# Altium PCB WIRELM-SMD_E73-2G4M08S1C.pcbdoc
Units mm, origin at the board's own origin, x right, y up, seen from the top; angles counter-clockwise.
Board outline 27.71 x 31.76 mm, 2 copper layers (Top Layer, Bottom Layer); 1 components, 0 nets, 43 pads, 0 vias.
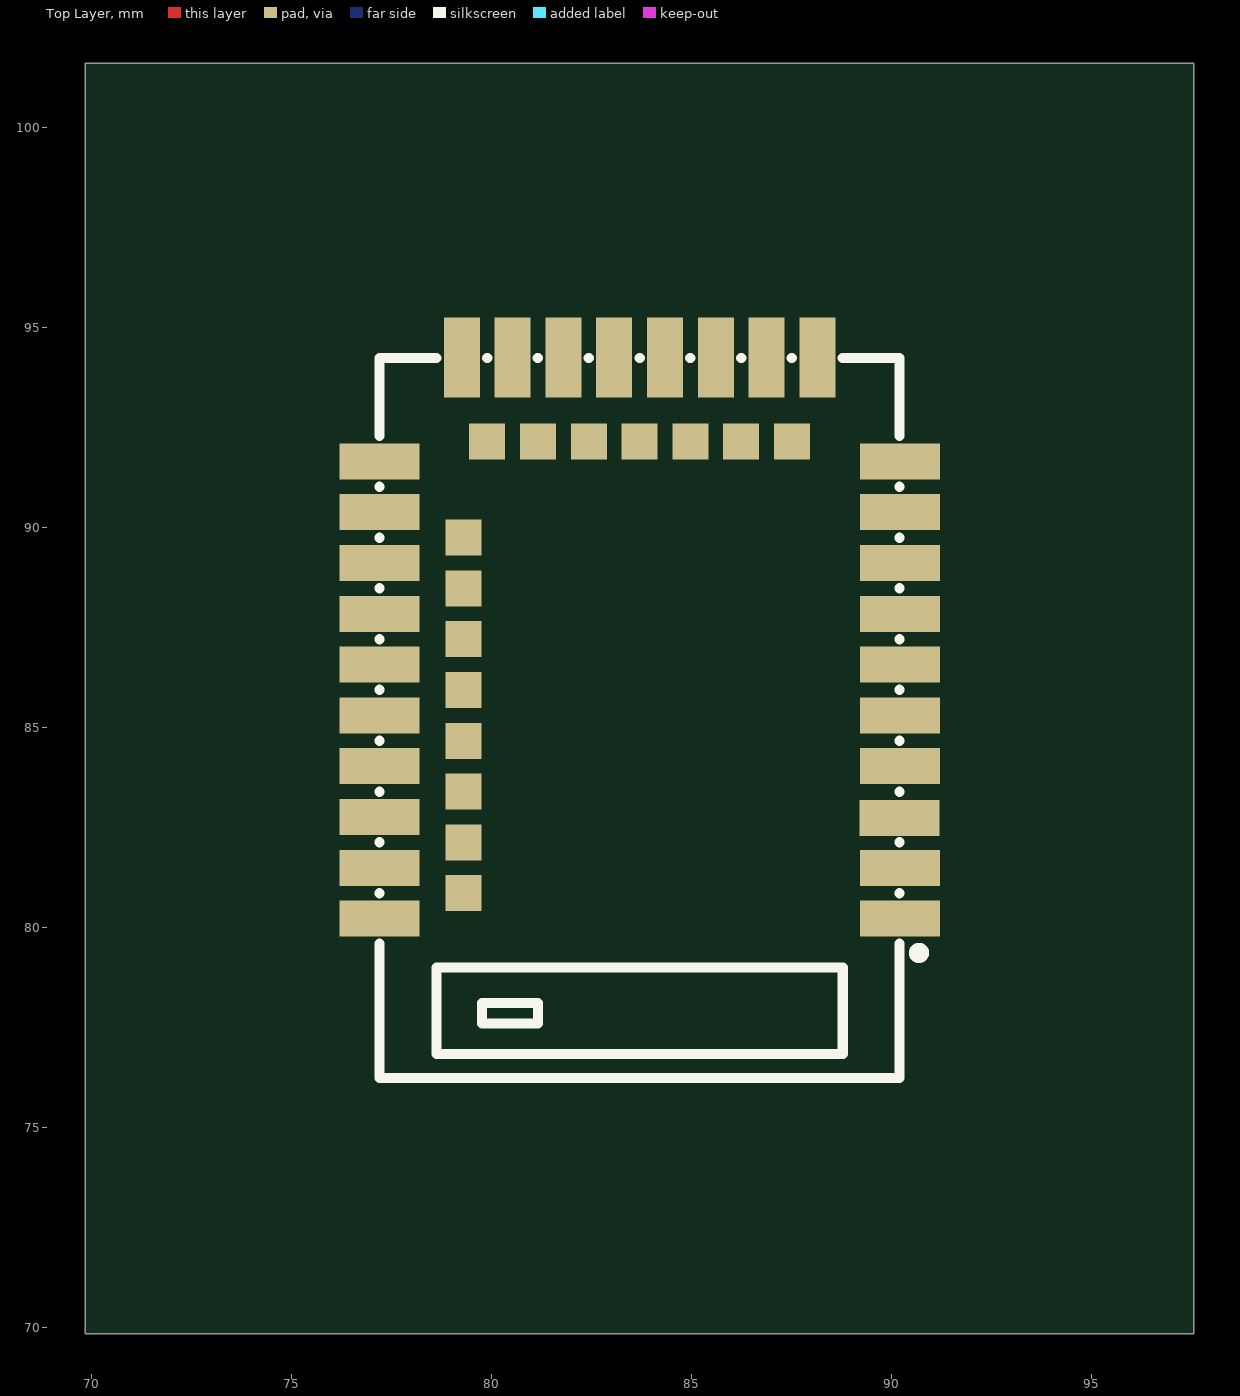
[diagram p0: Top Layer view]
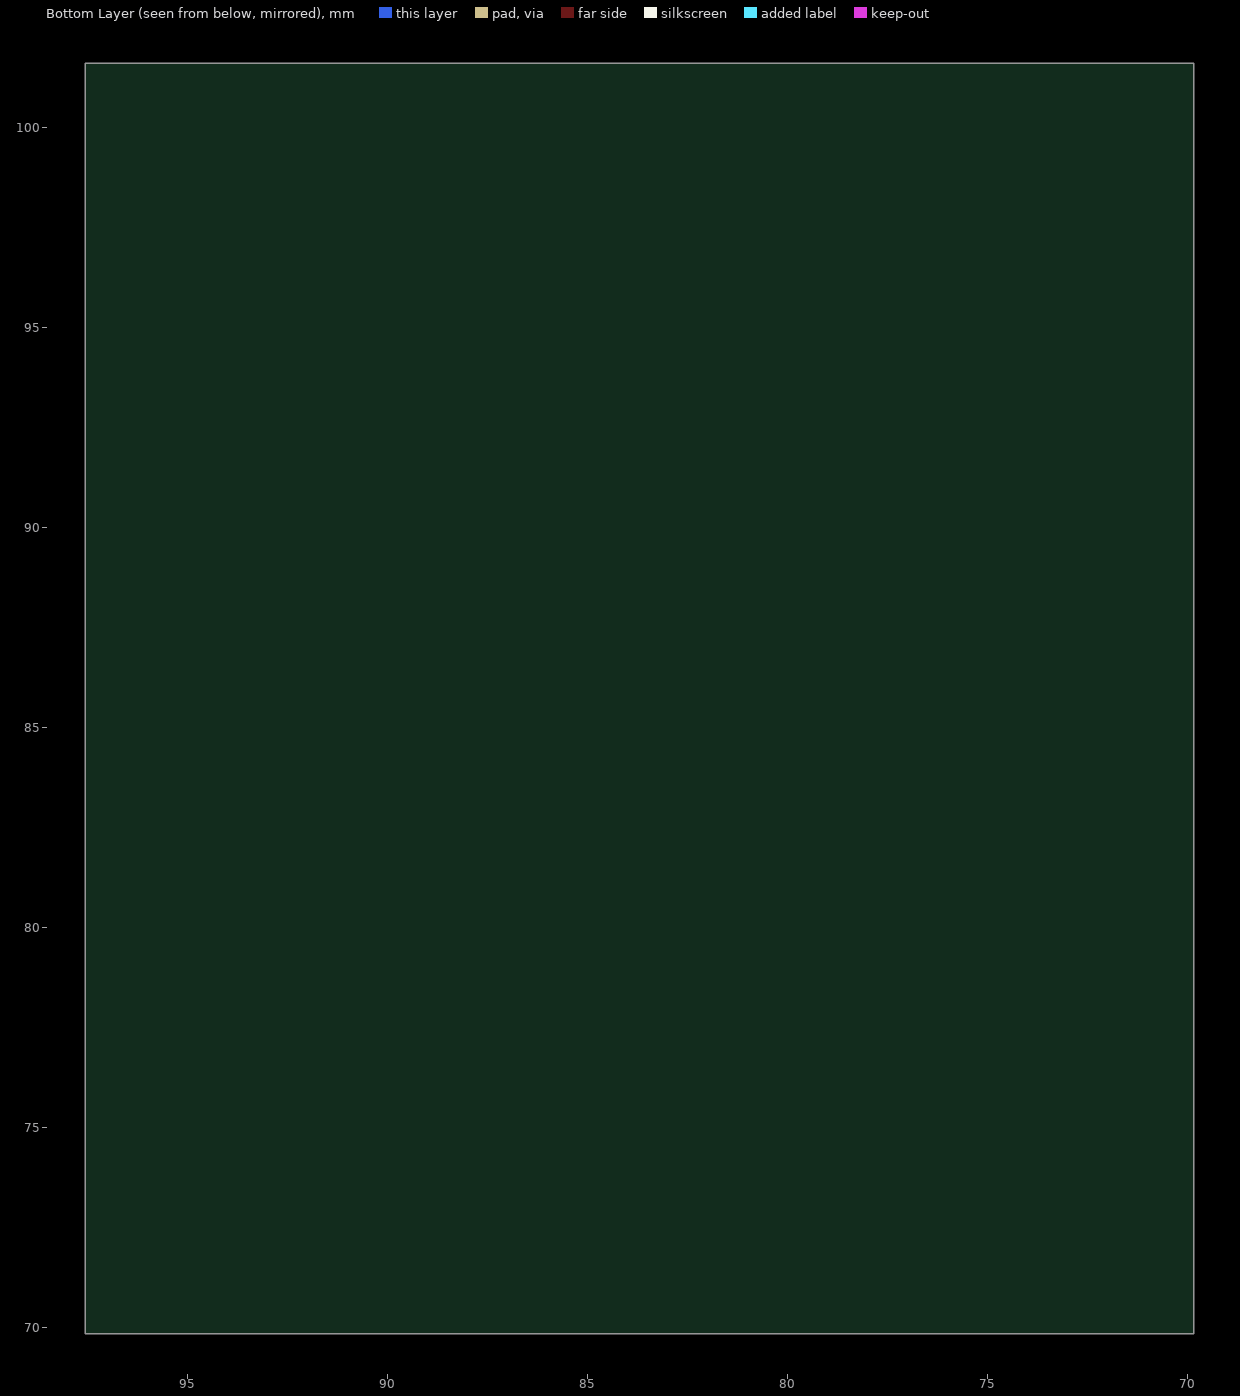
[diagram p1: Bottom Layer view, seen from below]

## Layer stack, top to bottom
Top Layer: signal copper (thickness not stored)
Dielectric: dielectric 0.32, FR-4, Dk 4.8
Bottom Layer: signal copper (thickness not stored)

## Board outline
97.56,69.85 69.85,69.85 69.85,101.61 97.56,101.61

## Design rules (kind name [scope] priority, off if disabled: settings)
Clearance safeClearance [All] p1: gap=0.178 ignorepadtopadclearanceinfootprint=FALSE except(0.152: Track-Track Track-SMDPad SMDPad-SMDPad Track-THPad SMDPad-THPad THPad-THPad Track-Via SMDPad-Via THPad-Via Via-Via Track-Fill SMDPad-Fill THPad-Fill Via-Fill Fill-Fill Track-Region SMDPad-Region THPad-Region Via-Region Fill-Region Region-Region Track-Poly SMDPad-Poly THPad-Poly Via-Poly Fill-Poly Region-Poly Poly-Poly Track-Text SMDPad-Text THPad-Text Via-Text Fill-Text Region-Text Poly-Text Text-Text; 0.175: Track-Hole SMDPad-Hole THPad-Hole Via-Hole Fill-Hole Region-Hole Poly-Hole Text-Hole Sheet-Hole; 0.3: Track-Sheet SMDPad-Sheet THPad-Sheet Via-Sheet Fill-Sheet Region-Sheet Poly-Sheet Text-Sheet)
DiffPairsRouting differentialPair [All] p1: maxuncoupledlength=10 minlimit=6 maxlimit=50 mostfreqgap=6 toplayer_minwidth=5 toplayer_prefwidth=10 toplayer_maxwidth=100 bottomlayer_minwidth=5 bottomlayer_prefwidth=10 bottomlayer_maxwidth=100
PasteMaskExpansion pasteMaskExpansion [All] p1:
PlaneConnect innerPlane [All] p1: planeconnectstyle=Relief reliefexpansion=0.508 reliefentries=4 reliefconductorwidth=0.254 reliefairgap=0.254
PolygonConnect copperRegion [All] p1: connectstyle=Relief reliefentries=4 reliefconductorwidth=10 polygonreliefangle="90 Angle" airgapwidth=10
RoutingVias viaSize [All] p1: viastyle="Through Hole" holewidth=12.0078 minholewidth=11.811 maxholewidth=236.2204 width=24.0158 minwidth=19.685 maxwidth=393.7008
SolderMaskExpansion solderMaskExpansion [All] p1: useseparateexpansions=TRUE expansion=2 expansionbottom=2
Width trackWidth [All] p1: maxlimit=100 minlimit=5 preferedwidth=10

## Components (designator, comment, footprint, x,y, rotation, side; value= is the part's Value field where it differs from the comment)
? "WIRELM-SMD_E73-2G4M08S1C" WIRELM-SMD_E73-2G4M08S1C 83.705,87.245 r0 top

## Footprints (in the part's own frame and the unit in brackets; to place one, negate y for a bottom-side part, rotate by r counter-clockwise, add the part's x,y. Pads: shape width x height; smd on the part's side, far side on the other; paste and mask are expansions set on the pad)
WIRELM-SMD_E73-2G4M08S1C [mm]
  rect 2x0.9 smd: 1(6.505,-7.015) 2(6.505,-5.745) 3(6.5,-4.5) 4(6.505,-3.205) 5(6.505,-1.935) 6(6.505,-0.665) 7(6.505,0.605) 8(6.505,1.875) 9(6.505,3.145) 10(6.505,4.415) 26(-6.505,4.415) 27(-6.505,3.145) 29(-6.505,1.875) 31(-6.505,0.605) 33(-6.505,-0.665) 35(-6.505,-1.935) 37(-6.505,-3.205) 39(-6.505,-4.475) 41(-6.505,-5.745) 43(-6.505,-7.015)
  rect 0.9x2 smd: 11(4.445,7.015) 13(3.175,7.015) 15(1.905,7.015) 17(0.635,7.015) 19(-0.635,7.015) 21(-1.905,7.015) 23(-3.175,7.015) 25(-4.445,7.015)
  rect 0.9x0.9 smd: 12(3.81,4.915) 14(2.54,4.915) 16(1.27,4.915) 18(0,4.915) 20(-1.27,4.915) 22(-2.54,4.915) 24(-3.81,4.915) 28(-4.405,2.51) 30(-4.405,1.24) 32(-4.405,-0.03) 34(-4.405,-1.3) 36(-4.405,-2.57) 38(-4.405,-3.84) 40(-4.405,-5.11) 42(-4.405,-6.38)
  silkscreen extent -6.5,-11 7.11,7

## Nets (pads, with @x,y where several pads share a name; then routed paths per layer and width w, separated by ;. In a path a pad name is that pad's centre, name@x,y a point inside that pad or via, vN(x,y) a via of type N, cw(c..) or ccw(c..) an arc to the next point about the centre after c; other vN are vias at no path point)
pads on no net: ?.1 ?.2 ?.3 ?.4 ?.5 ?.6 ?.7 ?.8 ?.9 ?.10 ?.11 ?.12 ?.13 ?.14 ?.15 ?.16 ?.17 ?.18 ?.19 ?.20 ?.21 ?.22 ?.23 ?.24 ?.25 ?.26 ?.27 ?.28 ?.29 ?.30 ?.31 ?.32 ?.33 ?.34 ?.35 ?.36 ?.37 ?.38 ?.39 ?.40 ?.41 ?.42 ?.43